# Altium PCB KRing_B3.PcbDoc
Units mm, origin at the board's own origin, x right, y up, seen from the top; angles counter-clockwise.
Board outline 37.8 x 37.8 mm, 2 copper layers (Top Layer, Bottom Layer); 76 components, 48 nets, 272 pads, 208 vias.
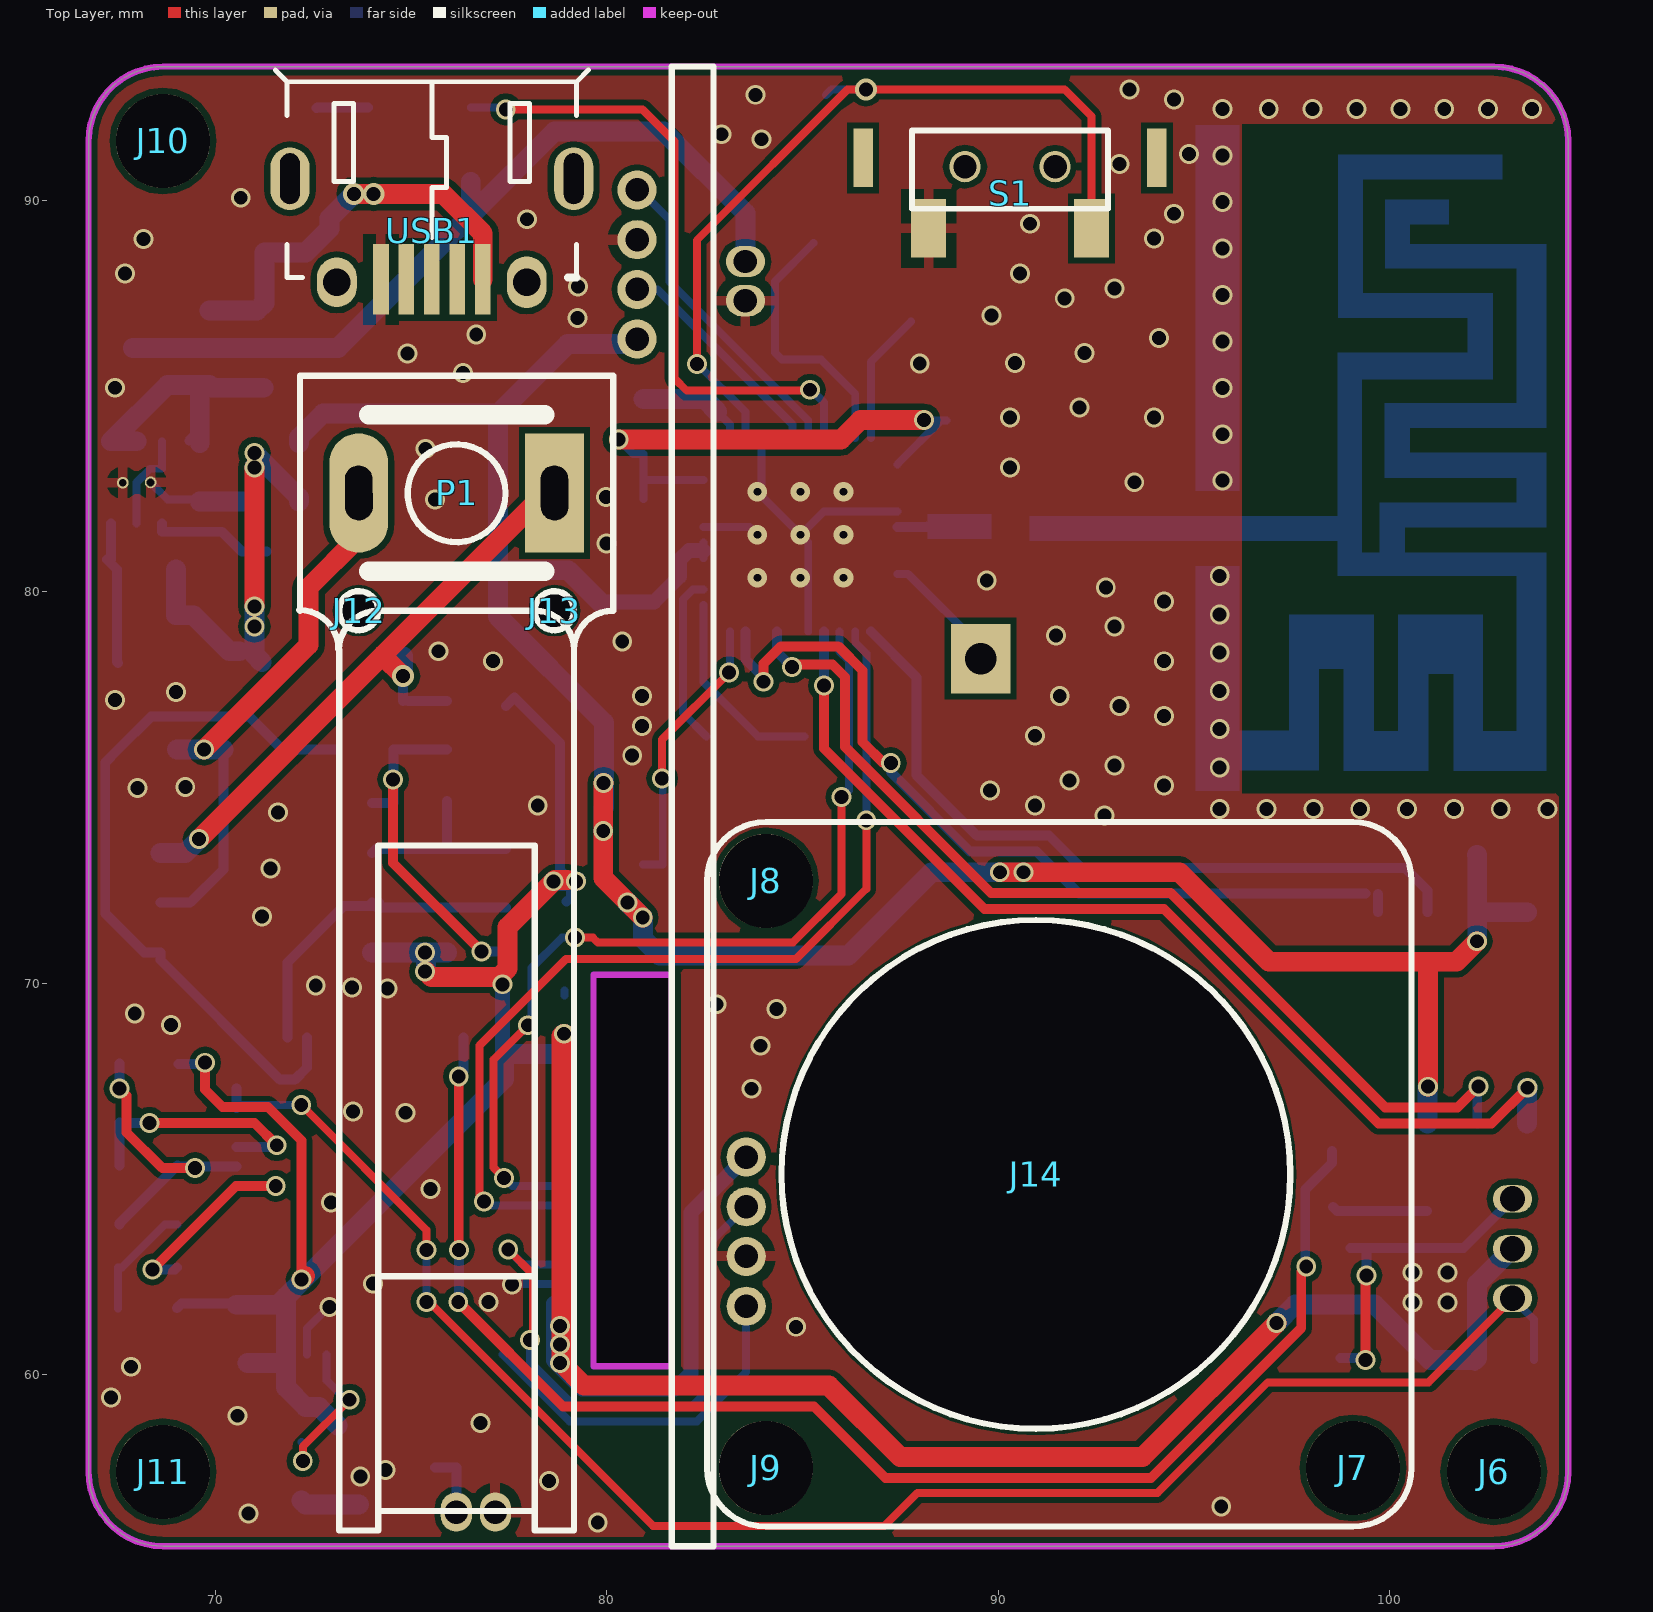
[diagram p0: Top Layer view]
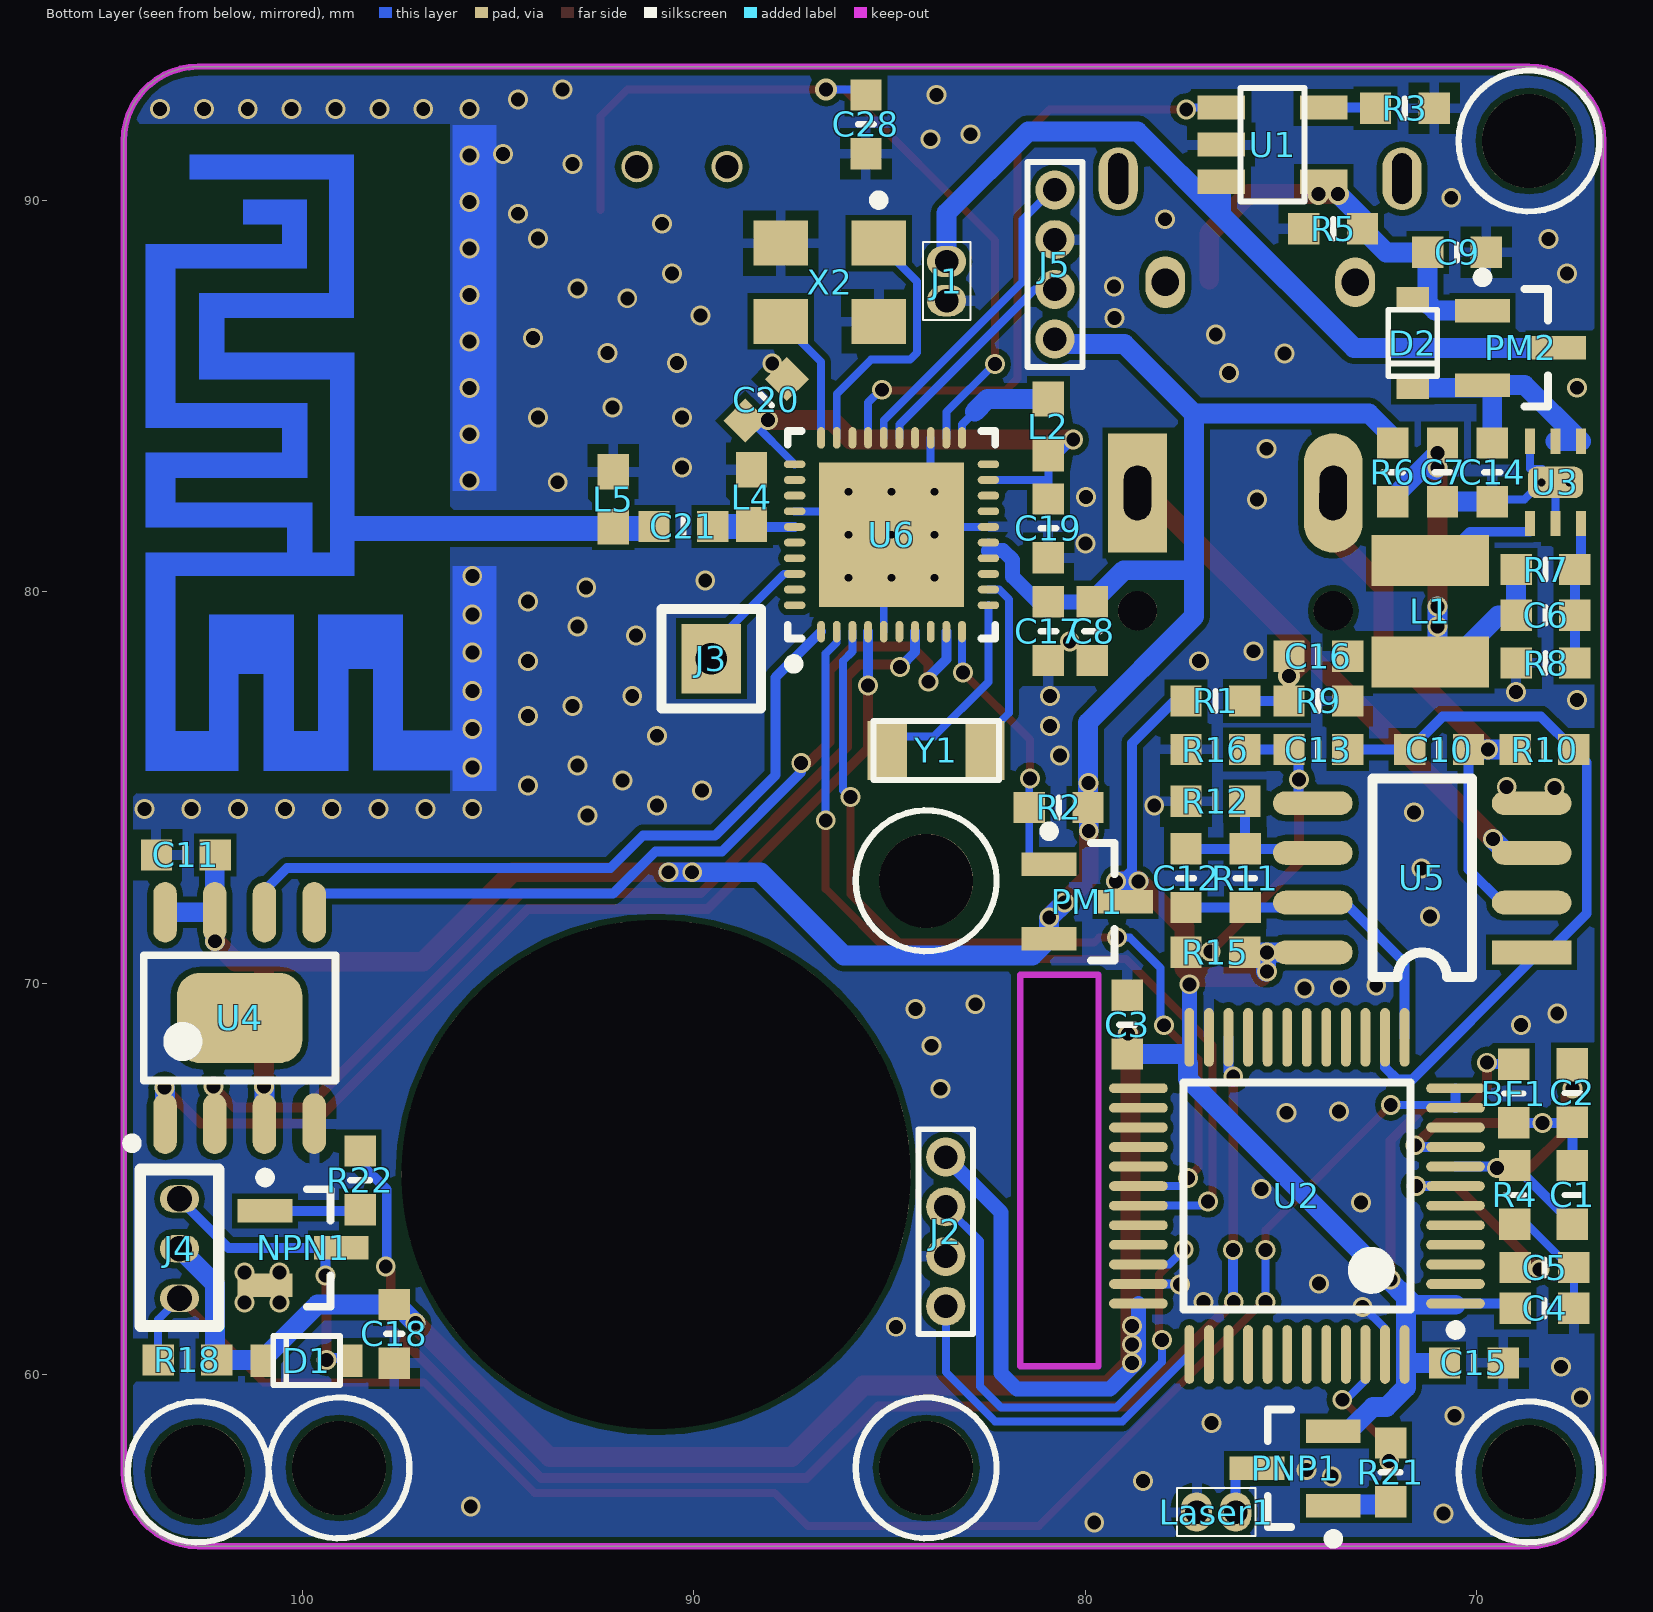
[diagram p1: Bottom Layer view, seen from below]

## Layer stack, top to bottom
Top Layer: signal copper 0.0356
Dielectric: dielectric 0.32, FR-4, Dk 4.8
Bottom Layer: signal copper 0.0356

## Board outline
66.758,57.522 66.758,91.522 cw(c68.658,91.522) 68.658,93.422 102.658,93.422 cw(c102.658,91.522) 104.558,91.522 104.558,57.522 cw(c102.658,57.522) 102.658,55.622 68.658,55.622 cw(c68.658,57.522)
cut-out: 79.666,70.21 81.673,70.21 81.673,60.228 79.666,60.228

## Design rules (kind name [scope] priority, off if disabled: settings)
Clearance "6mil Special" [(HasFootprint('FPC 0.5mm 4P') OR HasFootprint('FPC 0.5mm 16P') OR HasFootprint('QFN40P500X500X90_HS-41L'))] p1: gap=0.152
Clearance "8mil all" [All] p2: gap=0.152
ComponentClearance [All] p1: gap=-100 collisioncheckmode=3 verticalgap=0.254 showdistances=FALSE
Height [All] p1: minheight=0 maxheight=50.8 prefheight=12.7
HoleSize [All] p1: absolutevalues=TRUE maxlimit=1817.048 minlimit=0 maxpercent=80.000 minpercent=20.000
HoleToHoleClearance [All] p1: gap=0.203 allowstackedmicrovias=TRUE
MinimumSolderMaskSliver [All] p1: minsoldermaskwidth=0
PolygonConnect PolygonConnect_1 [isvia] p1: connectstyle=Direct reliefconductorwidth=0.254 reliefentries=4 polygonreliefangle="90 Angle" airgapwidth=0.254
PolygonConnect [All] p2: connectstyle=Relief reliefconductorwidth=0.254 reliefentries=4 polygonreliefangle="90 Angle" airgapwidth=0.254
RoutingCorners [All] p1: cornerstyle=45-Degree minsetback=0.254 maxsetback=2.54
RoutingVias [All] p1: holewidth=0.356 width=0.508 viastyle="Through Hole" minholewidth=0.356 minwidth=0.508 maxholewidth=2.54 maxwidth=5.08
SilkToSilkClearance [All] p1: silktosilkclearance=0
SilkToSolderMaskClearance [IsPad] p1: minsilkscreentomaskgap=0 clearancetoexposedcopper=TRUE
SolderMaskExpansion [All] p1: expansion=0.102
Width 20mil_Power [(InNet('EP_SUPPLY&VBAT') OR InNet('PSUPPLY') OR InNet('P_3.3V') OR InNet('PSUPPLYBAT') OR InNet('P_3.3V') OR InNet('P_5V'))] p1: maxlimit=1000 minlimit=0.203 preferedwidth=0.508
Width 8mil_Basic [All] p2: maxlimit=100 minlimit=0.203 preferedwidth=0.254
20 further rules are at their usual default settings.

## Components (designator, comment, footprint, x,y, rotation, side; value= is the part's Value field where it differs from the comment)
BF1 "BF" R0603 69.049,67.188 r90 bottom
C1 "1uf" C0603 67.55,64.597 r90 bottom
C2 "0.1uf" C0603 67.55,67.201 r270 bottom
C3 "1uf" C0603 78.921,68.947 r270 bottom
C4 "1uf" C0603 68.262,61.701 r0 bottom
C5 "1uf" C0603 68.262,62.743 r0 bottom
C6 "22pf" C0603 68.236,79.405 r180 bottom
C7 "10uf" C0603 70.866,83.058 r90 bottom
C8 "1uf" C0603 79.819,78.999 r90 bottom
C9 "1uf" C0603 70.497,88.676 r0 bottom
C10 "6.8pF" C0603 70.954,75.976 r180 bottom
C11 "10uf" C0603 102.973,73.283 r180 bottom
C12 "240pF" C0603 77.419,72.688 r90 bottom
C13 "0.15uf" C0603 74.041,75.976 r180 bottom
C14 "10uf" C0603 69.596,83.058 r270 bottom
C15 "1uf" C0603 70.065,60.304 r180 bottom
C16 "1uf" C0603 74.041,78.359 r180 bottom
C17 "10uf" C0603 80.936,78.999 r90 bottom
C18 "10uf" C0603 97.647,61.049 r90 bottom
C19 "1uf" C0603 80.936,81.627 r270 bottom
C20 "1uf" C0603 88.145,84.909 r135 bottom
C21 "1uf" C0603 90.261,81.674 r0 bottom
C28 "10uf" C0603 85.598,91.948 r90 bottom
D1 "1N5817" SOD323(0805) 99.888,60.364 r0 bottom
D2 "1N5817" SOD323(0805) 71.628,86.36 r270 bottom
J1 "CON2" BATTRY_CONNECTOR 83.536,88.443 r270 bottom
J2 "CON4" "CON4 1mm" 83.558,63.66 r90 bottom
J3 "CON1" CON1 89.548,78.295 r180 bottom
J4 "CON3" "Motor Connector" 103.134,63.226 r270 bottom
J5 "CON4" "CON4 1mm" 80.77,88.366 r270 bottom
J6 "CON1" 2.4mm#1 102.755,57.51 r0 top
J7 "CON1" 2.4mm#2 99.097,57.688 r0 top
J8 "CON1" 2.4mm#3 84.06,72.623 r0 top
J9 "CON1" 2.4mm#4 83.933,57.663 r0 top
J10 "CON1" 2.4mm#5 68.744,91.546 r0 top
J11 "CON1" 2.4mm#6 68.658,57.51 r0 top
J12 "CON1" 0.5mm 73.658,79.522 r0 top
J13 "CON1" 0.5mm 78.658,79.522 r0 top
J14 "CON1" 6.5mm 91.02,65.181 r0 top
L1 "4.7uh" GDNR3012 71.183,79.507 r180 bottom
L2 "2.2uh" L0603 80.936,84.227 r270 bottom
L4 "NC" L0603 88.519,82.423 r270 bottom
L5 "NC" L0603 92.054,82.369 r270 bottom
Laser1 "Laser" BATTRY_CONNECTOR 76.152,56.494 r0 bottom
NPN1 "8050" SOT23-3 99.974,63.242 r180 bottom
P1 "photodetector" BPW34 76.161,82.529 r180 top
PM1 "Si2303" SOT23-3 79.945,72.089 r180 bottom
PM2 "Si2303" SOT23-3 68.871,86.238 r180 bottom
PNP1 "8550" SOT23-3 74.632,57.611 r0 bottom
R1 "4K7" R0603 76.669,77.216 r0 bottom
R2 "100K" R0603 80.675,74.495 r180 bottom
R3 "20K" R0603 71.831,92.359 r0 bottom
R4 "0" R0603 69.024,64.597 r90 bottom
R5 "1M" R0603 73.66,89.281 r0 bottom
R6 "50R" R0603 72.136,83.058 r270 bottom
R7 "120K" R0603 68.236,80.574 r0 bottom
R8 "27K" R0603 68.236,78.186 r0 bottom
R9 "1K" R0603 74.041,77.216 r0 bottom
R10 "10M" R0603 68.262,75.976 r180 bottom
R11 "220K" R0603 75.907,72.688 r270 bottom
R12 "3K" R0603 76.669,74.655 r180 bottom
R15 "2M" R0603 76.669,70.795 r180 bottom
R16 "510" R0603 76.669,75.976 r180 bottom
R18 "10K" R0603 102.93,60.382 r180 bottom
R21 "1K" R0603 72.194,57.51 r90 bottom
R22 "1K" R0603 98.519,64.97 r90 bottom
S1 "SW_Mini" SW_Mini 90.297,90.59 r180 top
U1 "LTC4054" LTC4054 75.21,91.43 r270 bottom
U2 "STM32F103C8T6" TSQFP50P900X900X160-48L 74.586,64.572 r0 bottom
U3 "TPS62260" QFN2x2-6 68.632,81.75 r90 bottom
U4 "W25X20CLSNIG" SOIC8 101.598,69.118 r90 bottom
U5 "LMC6482" LMC6482 68.592,70.795 r0 bottom
U6 "DA14580-01AT1" QFN40P500X500X90_HS-41L 84.943,81.462 r90 bottom
USB1 "MicroUSB" MICROUSB 75.526,89.235 r270 top locked
X2 "3225 16Mhz" 3225 86.522,87.911 r270 bottom
Y1 "FC-135" FC-135 83.804,75.951 r0 bottom

## Footprints (in the part's own frame and the unit in brackets; to place one, negate y for a bottom-side part, rotate by r counter-clockwise, add the part's x,y. Pads: shape width x height; smd on the part's side, far side on the other; paste and mask are expansions set on the pad)
0.5mm [mm]
  round 1 hole 1: 1(0,0)
2.4mm#1 [mm]
  round 2.4 hole 2.4: 1(-0.097,0.012)
2.4mm#2 [mm]
  round 2.4 hole 2.4: 1(-0.039,-0.066)
2.4mm#3 [mm]
  round 2.4 hole 2.4: 1(-0.002,-0.001)
2.4mm#4 [mm]
  round 2.4 hole 2.4: 1(0.125,-0.041)
2.4mm#5 [mm]
  round 2.4 hole 2.4: 1(-0.086,-0.024)
2.4mm#6 [mm]
  round 2.4 hole 2.4: 1(0,0.012)
6.5mm [mm]
  round 13 hole 13 unplated: ""(-0.062,-0.059)
3225 [mm]
  rect 1.15x1.4 smd: 1(-1,1.25) 2(-1,-1.25) 3(1,-1.25) 4(1,1.25)
  silkscreen extent -2.22,1.13 -1.98,1.37, body extent -1.25,-1.6 1.25,1.6, height 0.7
BATTRY_CONNECTOR [mm]
  oval 0.8x1 hole 0.6: 1(0,0) 2(1,0)
  silkscreen extent -0.5,-0.61 1.5,0.61
BPW34 [mm]
  rect 1.5x3.048 hole 0.7 slot 1.4 at 90.5 deg: A(-2.5,0)
  oval 1.5x3.048 hole 0.7 slot 1.4 at 90.5 deg: C(2.5,0)
  silkscreen extent -2.25,-2 2.25,2
C0603 [mm]
  rect 0.8x0.8 smd: 1(-0.75,0) 2(0.75,0)
  silkscreen extent 0,-0.2 0,0.2, body extent -0.8,-0.4 0.8,0.4, height 0.8
CON1 [mil]
  rect 60x70 hole 32: 1(0,0)
  silkscreen extent -50,-50 50,50, body extent -51,-50 52,50, height 295
"CON4 1mm" [mm]
  round 1 hole 0.6: 1(-1.905,0) 2(-0.635,0) 3(0.635,0) 4(1.905,0)
  silkscreen extent -2.62,-0.7 2.61,0.7
FC-135 [mm]
  rect 1x1.5 smd: 1(-1.25,0) 2(1.25,0)
  silkscreen extent -1.6,-0.75 1.6,0.75, body extent -1.6,-0.75 1.6,0.75, height 0.8
GDNR3012 [mm]
  rect 3x1.3 smd: 1(0,1.3) 2(0,-1.3)
  body extent -1.5,-1.5 1.5,1.5, height 1.2
L0603 [mm]
  rect 0.9x0.8 smd: 1(-0.7,0) 2(0.7,0)
  body extent -0.8,-0.4 0.8,0.4, height 0.8
LMC6482 [mil]
  rect 80x24 smd: 1(0,0)
  oval 80x24 smd: 2(0,-50) 3(0,-100) 4(0,-150) 5(220,-150) 6(220,-100) 7(220,-50) 8(220,0)
  silkscreen extent 60,-175 160,25, body extent 24,-176 196,27, height 43
LTC4054 [mm]
  rect 0.62x1.22 smd: 1(-0.95,-1.31) 2(0,-1.31) 3(0.95,-1.31) 4(0.95,1.31) 5(-0.95,1.31)
  silkscreen extent -1.45,-0.81 1.45,0.81, body extent -1.45,-0.82 1.45,0.81, height 1
MICROUSB [mm]
  oval 1.6x1 hole 0.5 slot 1.3 at 0 deg unplated: 0(-1.325,3.625) 0(-1.325,-3.625)
  rect 1.8x0.4 smd: 1(1.25,1.3) 2(1.25,0.65) 3(1.25,0) 4(1.25,-0.65) 5(1.25,-1.3)
  oval 1.321x1.016 hole 0.7 unplated: ""(1.325,2.425)
  oval 1.27x1.016 hole 0.7 unplated: ""(1.325,-2.425)
  silkscreen extent -4.1,-4 1.2,4, body extent -3.62,-3.96 1.81,4.02, height 2.99
"Motor Connector" [mm]
  oval 0.7x1 hole 0.65: 1(-1.27,0) 2(0,0) 3(1.27,0)
  silkscreen extent -2.02,-1 1.98,1
QFN2x2-6 [mm]
  rect 0.65x0.25 smd: 1(0,0) 2(0,-0.65) 3(0,-1.3) 4(2.1,-1.3) 5(2.1,-0.65) 6(2.1,0)
  round 0.3 hole 0.2: 7(1.04,-1) 7(1.05,-0.29)
  rrect50% 0.8x1.4 smd: 7(1.05,-0.65)
  body extent 0.22,-1.59 1.86,0.29, height 0.8
QFN40P500X500X90_HS-41L [mm] "QFN, 40-Leads, Body 5.00x5.00mm, Pitch 0.40mm, Thermal Pad 3.70x3.70mm, IPC High Density"
  oval 0.55x0.2 smd: 1(-2.475,1.8) 2(-2.475,1.4) 3(-2.475,1) 4(-2.475,0.6) 5(-2.475,0.2) 6(-2.475,-0.2) 7(-2.475,-0.6) 8(-2.475,-1) 9(-2.475,-1.4) 10(-2.475,-1.8) 21(2.475,-1.8) 22(2.475,-1.4) 23(2.475,-1) 24(2.475,-0.6) 25(2.475,-0.2) 26(2.475,0.2) 27(2.475,0.6) 28(2.475,1) 29(2.475,1.4) 30(2.475,1.8)
  oval 0.2x0.55 smd: 11(-1.8,-2.475) 12(-1.4,-2.475) 13(-1,-2.475) 14(-0.6,-2.475) 15(-0.2,-2.475) 16(0.2,-2.475) 17(0.6,-2.475) 18(1,-2.475) 19(1.4,-2.475) 20(1.8,-2.475) 31(1.8,2.475) 32(1.4,2.475) 33(1,2.475) 34(0.6,2.475) 35(0.2,2.475) 36(-0.2,2.475) 37(-0.6,2.475) 38(-1,2.475) 39(-1.4,2.475) 40(-1.8,2.475)
  rect 3.7x3.7 smd: 41(0,0)
  silkscreen extent -3.42,-2.65 2.65,2.65, body extent -2.5,-2.5 2.5,2.5, height 0.9
R0603 [mm]
  rect 0.8x0.8 smd: 1(-0.75,0) 2(0.75,0)
  silkscreen extent 0,-0.25 0,0.25, body extent -0.8,-0.4 0.8,0.4, height 0.5
SOD323(0805) [mm]
  rect 0.63x0.83 smd: A(-1.115,0) C(1.115,0)
  silkscreen extent -0.85,-0.63 0.85,0.63, body extent -0.85,-0.63 0.86,0.63, height 1.1
SOIC8 [mm]
  oval 1.55x0.6 smd: 1(-2.7,1.905) 2(-2.7,0.635) 3(-2.7,-0.635) 4(-2.7,-1.905) 5(2.7,-1.905) 6(2.7,-0.635) 7(2.7,0.635) 8(2.7,1.905)
  rrect50% 2.3x3.2 smd: 9(0,0)
  silkscreen extent -3.32,-2.45 1.6,2.88, body extent -1.65,-2.41 1.65,2.41, height 1.35
SOT23-3 [mm]
  rect 1.4x0.6 smd: 1(-0.975,0.95) 2(-0.975,-0.95) 3(0.975,0)
  silkscreen extent -1.1,-1.5 0.7,1.92, body extent -0.7,-1.5 0.7,1.5, height 1
SW_Mini [mm]
  rect 0.9x1.5 smd: 1(2.08,1.3) 2(-2.08,1.3)
  rect 0.5x1.5 smd: ""(-3.75,-0.5) ""(3.75,-0.5)
  round 0.8 hole 0.6: ""(-1.15,-0.277) ""(1.15,-0.277)
  silkscreen extent -2.5,-1.2 2.5,0.8, body extent -3.76,-2.28 3.74,1.72, height 3.4
TSQFP50P900X900X160-48L [mm] "TSQFP, 48-Leads, Body 7.00x7.00mm, Pitch 0.50mm, IPC High Density"
  oval 1.5x0.25 smd: 1(-4.05,2.75) 2(-4.05,2.25) 3(-4.05,1.75) 4(-4.05,1.25) 5(-4.05,0.75) 6(-4.05,0.25) 7(-4.05,-0.25) 8(-4.05,-0.75) 9(-4.05,-1.25) 10(-4.05,-1.75) 11(-4.05,-2.25) 12(-4.05,-2.75) 25(4.05,-2.75) 26(4.05,-2.25) 27(4.05,-1.75) 28(4.05,-1.25) 29(4.05,-0.75) 30(4.05,-0.25) 31(4.05,0.25) 32(4.05,0.75) 33(4.05,1.25) 34(4.05,1.75) 35(4.05,2.25) 36(4.05,2.75)
  oval 0.25x1.5 smd: 13(-2.75,-4.05) 14(-2.25,-4.05) 15(-1.75,-4.05) 16(-1.25,-4.05) 17(-0.75,-4.05) 18(-0.25,-4.05) 19(0.25,-4.05) 20(0.75,-4.05) 21(1.25,-4.05) 22(1.75,-4.05) 23(2.25,-4.05) 24(2.75,-4.05) 37(2.75,4.05) 38(2.25,4.05) 39(1.75,4.05) 40(1.25,4.05) 41(0.75,4.05) 42(0.25,4.05) 43(-0.25,4.05) 44(-0.75,4.05) 45(-1.25,4.05) 46(-1.75,4.05) 47(-2.25,4.05) 48(-2.75,4.05)
  silkscreen extent -4.17,-2.9 2.9,3.55, body extent -3.5,-3.5 3.5,3.5, height 1.6

## Part data
BF1: "磁珠"
C1 C2 C3 C4 C5 C6 C7 C8 C9 C10 C11 C12 C13 C14 C15 C16 C17 C18 C19 C20 C21 C28: library part C
D1 D2: library part Diode
L1 L2 L4 L5: library part L
NPN1: library part NPN
PM1 PM2: library part PMOS
PNP1: library part PNP
R1 R2 R3 R4 R5 R6 R7 R8 R9 R10 R11 R12 R15 R16 R18 R21 R22: library part R

## Via types
v1: diameter 0.508, hole 0.356, Top Layer to Bottom Layer, 195 vias
v2: diameter 0.5, hole 0.2, Top Layer to Bottom Layer, 9 vias
v3: diameter 0.559, hole 0.356, Top Layer to Bottom Layer, 4 vias

## Nets (pads, with @x,y where several pads share a name; then routed paths per layer and width w, separated by ;. In a path a pad name is that pad's centre, name@x,y a point inside that pad or via, vN(x,y) a via of type N, cw(c..) or ccw(c..) an arc to the next point about the centre after c; other vN are vias at no path point)
AGND: C1.1 C2.1 R4.2 U2.8 | length 7.6
  Top Layer w0.254: v1(67.55,67.315) 67.728,67.137 67.728,66.196 68.641,65.283 v1(69.481,65.283)
  Bottom Layer w0.254: C1.1 67.55,63.874 R4.2 69.049,65.322 v1@69.481,65.322 ; v1(67.55,67.315) C2.1 ; v1(69.481,65.283) v1@69.481,65.322 ; U2.8 v1@69.481,65.322
C_LASER: R21.2 U2.46 | length 4
  Top Layer w0.203: v1(72.23,57.799) 72.23,58.167 v1(73.428,59.365)
  Bottom Layer w0.203: R21.2@72.199,58.286 72.23,58.254 v1(72.23,57.799) ; U2.46 72.836,59.861 73.332,59.365 v1(73.428,59.365)
C_MOTOR: R22.2 U2.22 | length 36.7
  Top Layer w0.254: v1(76.201,61.866) 78.877,59.191 85.291,59.191 87.116,57.366 93.902,57.366 97.737,61.201 97.737,62.638 v1(97.864,62.765) ; v1(76.214,67.622) 76.214,63.2 v1(76.22,63.194)
  Bottom Layer w0.254: v1(76.201,61.866) 76.22,61.885 v1(76.22,63.194) ; v1(76.214,67.622) 76.336,67.744 U2.22 ; v1(97.864,62.765) 97.84,62.79 97.84,64.736 98.519,65.415 R22.2
CHARGE_STATES: U1.1 U6.27 | length 16.6
  Top Layer w0.203: v1(77.415,92.328) 80.907,92.328 81.727,91.508 81.727,85.455 82.04,85.142 85.162,85.142 v1(85.186,85.166)
  Bottom Layer w0.203: U1.1 77.363,92.38 v1(77.415,92.328) ; v1(85.186,85.166) 85.216,85.166 85.543,84.839 U6.27
DA_RXD: U2.30 U6.3 | length 23.1
  Top Layer w0.203: v1(77.374,65.028) 77.102,65.3 77.102,68.051 v1(77.982,68.932) ; v1(79.179,71.169) 79.64,71.169 79.766,71.043 84.749,71.043 85.989,72.283 v1(85.989,74.758)
  Bottom Layer w0.203: v1(77.374,65.028) 77.58,64.822 U2.30 ; v1(77.982,68.932) 78.073,69.022 78.073,70.393 78.849,71.169 v1(79.179,71.169) ; 85.943,78.644 85.943,78.478 ; U6.3 85.943,78.478 ; v1(85.989,74.758) 86.012,74.758 86.18,74.926 86.18,78.241 85.943,78.478
DA_TXD: U2.31 U6.2 | length 24.1
  Top Layer w0.203: v1(76.856,64.425) 76.746,64.535 76.746,68.414 78.956,70.624 84.833,70.624 86.625,72.416 v1(86.625,74.168)
  Bottom Layer w0.203: v1(76.856,64.425) 76.959,64.322 U2.31 ; U6.2 86.343,78.711 86.625,78.429 v1(86.625,74.168)
EVCC: C9.2 D2.A PM2.1 R5.1 U1.4 USB1.1 | length 10.7
  Top Layer w0.508: v3(73.533,90.17) v3(74.041,90.17) 75.819,90.17 76.826,89.163 USB1.1
  Bottom Layer w0.508: PM2.1 71.059,87.188 71.247,87.376 C9.2 72.305,88.676 R5.1 72.91,89.547 v3(73.533,90.17)
F_CLK: U4.6 U6.1 | length 19
  Bottom Layer w0.254: U6.1 87.91,77.82 87.91,75.319 89.448,73.781 91.295,73.781 92.127,72.949 100.39,72.949 100.963,72.376 U4.6
F_CS: U4.1 U6.4 | length 26.2
  Top Layer w0.254: v1(85.544,77.611) 85.544,76.004 89.647,71.901 94.235,71.901 99.714,66.422 102.6,66.422 v1(103.514,67.336)
  Bottom Layer w0.254: U6.4 85.544,78.986 v1(85.544,77.611)
  Bottom Layer w0.508: U4.1 103.503,67.325 v1(103.514,67.336)
F_MISO: U4.2 U6.7 | length 25.5
  Top Layer w0.254: v1(84.731,78.079) 84.797,78.145 85.765,78.145 86.078,77.832 86.078,76.045 89.815,72.308 94.403,72.308 99.882,66.829 101.728,66.829 v1(102.262,67.363)
  Bottom Layer w0.254: U6.7 84.343,78.467 v1(84.731,78.079) ; U4.2 102.233,67.334 v1(102.262,67.363)
F_MOSI: U4.5 U6.9 | length 21.8
  Top Layer w0.254: v1(84.002,77.707) 84.002,78.169 84.445,78.612 85.909,78.612 86.53,77.991 86.53,76.168 87.071,75.627 v1(87.251,75.627)
  Bottom Layer w0.254: U6.9 83.543,78.28 84.002,77.821 v1(84.002,77.707) ; v1(87.251,75.627) 87.251,75.399 89.276,73.375 90.974,73.375 92.053,72.296 99.38,72.296 ; U4.5 U4.5@99.693,72.281
GND: C3.1 C4.1 C5.1 C7.1 C8.1 C9.1 C11.1 C14.2 C15.2 C16.2 C17.1 C18.1 C19.2 C20.2 C28.1 J1.2 J2.2 J5.2 L4.1 L5.1 Laser1.2 NPN1.2 R3.1 R4.1 R5.2 R8.2 R9.1 R12.1 R16.1 S1.1 U1.2 U2.23 U2.35 U2.47 U3.2 U3.6 U3.7 U4.4 U5.4 U6.5 U6.16 U6.23 U6.34 U6.41 USB1.5 X2.2 X2.4 | length 20.5
  Bottom Layer w0.203: C4.1 C5.1 67.606,62.743 68.71,63.847 R4.1 ; U3.2 67.982,82.8 68.331,83.149 68.629,83.149 68.632,83.152 U3.6 ; U3.7@68.342,82.8 68.779,82.364 C14.2@69.582,82.364 ; U2.47 72.336,61.183 72.884,61.73 v1(72.916,61.73) ; v1(77.575,62.313) 77.584,62.322 U2.35 ; C3.1 C3.1@78.921,69.824 ; U6.16 83.643,81.662 v2(83.843,81.462) ; U6.23 83.943,82.462 v2(84.943,81.462) ; U6.5 85.143,81.262 v2(84.943,81.462) ; U6.34 85.543,82.062 v2(84.943,81.462)
  Bottom Layer w0.508: C14.2 C7.1
  other v1: 79.765,56.225 70.839,56.46 95.694,56.634 78.515,57.291 73.699,57.407 74.344,57.573 76.768,58.769 70.56,58.955 67.333,59.425 67.842,60.207 84.832,61.228 76.977,61.861 100.584,61.849 101.473,61.849 74.024,62.329 100.584,62.611 101.473,62.611 72.954,64.408 75.494,64.746 74.849,66.696 73.508,66.733 83.693,67.31 83.919,68.409 68.862,68.942 67.936,69.233 84.328,69.342 82.804,69.469 74.391,69.866 73.49,69.899 72.561,69.949 71.192,71.709 71.4,72.936 92.71,74.295 71.598,74.372 95.654,74.454 96.85,74.454 98.047,74.454 99.243,74.454 100.44,74.454 101.636,74.454 102.833,74.454 104.029,74.454 78.232,74.549 90.932,74.549 89.789,74.93 68.007,74.995 69.228,75.014 94.234,75.057 91.821,75.184 95.654,75.521 92.964,75.565 80.645,75.819 90.932,76.327 95.654,76.498 80.899,76.581 94.234,76.835 93.091,77.089 67.433,77.236 80.899,77.343 91.567,77.343 68.988,77.448 95.654,77.475 77.089,78.232 94.234,78.232 95.654,78.452 75.692,78.486 80.391,78.74 91.469,78.893 92.964,79.121 95.654,79.429 94.234,79.756 92.744,80.119 89.703,80.291 95.654,80.406 79.984,81.237 75.61,82.365 79.978,82.43 93.472,82.804 95.727,82.843 90.297,83.185 75.366,83.659 95.727,84.029 90.297,84.455 93.98,84.455 92.075,84.709 67.437,85.217 95.727,85.216 76.327,85.598 87.991,85.837 90.424,85.852 74.909,86.096 92.202,86.106 95.727,86.402 94.107,86.487 76.661,86.583 79.248,86.995 89.826,87.06 91.694,87.503 95.727,87.589 92.964,87.757 79.265,87.802 67.691,88.138 90.551,88.138 95.727,88.775 68.163,89.02 93.98,89.027 90.805,89.408 77.955,89.522 94.488,89.662 95.727,89.962 70.645,90.071 93.091,90.932 95.727,91.148 94.869,91.186 83.947,91.567 82.931,91.694 95.727,92.335 96.906,92.335 98.027,92.335 99.148,92.335 100.269,92.335 101.39,92.335 102.511,92.335 103.632,92.335 94.488,92.583 83.792,92.702 93.345,92.837
  other v2: 83.843,80.362 84.943,80.362 86.043,80.362 86.043,81.462 83.843,82.562 84.943,82.562 86.043,82.562
LASER_STATE: PM1.1 R2.1 U6.10 | length 7.2
  Top Layer w0.203: v1(81.409,75.24) 81.409,76.232 v1(83.122,77.945)
  Bottom Layer w0.203: PM1.1 81.425,73.039 R2.1 81.425,75.224 v1(81.409,75.24) ; v1(83.122,77.945) 83.143,77.966 U6.10
M_SIG: J4.3 R18.1 U2.11 U2.12 | length 42.9
  Top Layer w0.203: v1(72.191,66.898) 75.386,63.703 v1(75.386,63.188) ; v1(75.386,61.866) 75.454,61.866 81.181,56.139 87.083,56.139 87.929,56.985 94.06,56.985 96.884,59.809 100.986,59.809 J4.3
  Bottom Layer w0.203: U2.11 70.613,66.898 v1(72.191,66.898) ; v1(75.386,61.866) v1(75.386,63.188) ; J4.3 103.68,61.41 R18.1
  Bottom Layer w0.254: U2.11 U2.12
NetC5_2: C5.2 U2.7 | length 5.7
  Top Layer w0.254: v1(68.389,62.692) 70.522,64.826 v1(71.538,64.826)
  Bottom Layer w0.254: v1(68.389,62.692) 68.961,62.692 C5.2 ; U2.7 70.54,64.826 v1(71.538,64.826)
NetC6_1: C6.1 C7.2 L1.2 R6.2 R7.2 | length 10.3
  Top Layer w0.508: v1(70.993,79.629) v1(70.993,83.185)
  Bottom Layer w0.508: R7.2 C6.1 69.439,79.405 70.358,78.486 L1.2@70.612,78.486 ; v1(70.993,79.629) v1(70.993,79.121) 70.993,78.396 L1.2 ; v1(70.993,83.185) 71.064,83.114 71.064,83.485 72.136,82.413 R6.2
  other v1: 70.993,83.554
NetC6_2: C6.2 R7.1 R8.1 U3.3 | length 3.7
  Bottom Layer w0.254: R7.1@67.231,80.829 R7.1 C6.2 67.486,78.211 R8.1@67.512,78.186 ; R7.1@67.332,80.829 U3.3
NetC10_2: C10.2 P1.C R10.1 U5.2 | length 14.4
  Top Layer w0.508: v1(69.709,75.976) 72.376,78.643 72.376,80.116 73.661,81.401 P1.C
  Bottom Layer w0.254: U5.2 69.354,72.065 70.204,72.915 C10.2
  Bottom Layer w0.508: R10.1 v1(69.709,75.976) C10.2
NetC12_2: C12.2 R11.1 R12.2 U5.6 | length 4.7
  Bottom Layer w0.254: U5.6@74.002,73.335 74.105,73.438 R11.1 ; R12.2 75.919,73.45 R11.1 ; C12.2 R11.1
NetC13_1: C13.1 R15.1 R16.2 U5.5 | length 9.3
  Top Layer w0.254: v1(74.535,75.214) 74.535,73.081 v1(76.796,70.82)
  Bottom Layer w0.254: U5.5@74.002,74.605 74.549,74.605 74.549,75.976 R16.2 ; v1(76.796,70.82) 77.394,70.82 R15.1
NetC14_1: C14.1 D2.C PM2.2 U3.4 U3.5 | length 7.1
  Bottom Layer w0.254: C14.1@69.328,83.864 C14.1@69.532,84.067
  Bottom Layer w0.508: U3.5 U3.4 68.77,85.288 PM2.2 ; C14.1 69.596,85.217 D2.C@71.223,85.217
NetC19_1: C19.1 C20.1 L2.2 U6.19 U6.31 | length 13.6
  Top Layer w0.508: v1(80.302,83.895) 85.976,83.895 86.478,84.397 v1(88.103,84.397)
  Bottom Layer w0.203: v1(80.302,83.895) 80.67,83.527 L2.2 80.936,82.862 ; C19.1 80.936,82.862 ; U6.19 80.936,82.862 ; U6.31 C20.1@88.535,84.379 ; v1(88.103,84.397) 88.121,84.379 C20.1@88.535,84.379 ; C20.1 C20.1@88.535,84.379
NetC21_1: C21.1 L4.2 U6.35 | length 0.8
  Bottom Layer w0.254: U6.35 88.184,81.662 L4.2@88.19,81.668 ; L4.2@88.41,81.656 L4.2@88.437,81.629
NetC21_2: C21.2 L5.2
NetD1_A: D1.A J4.1 NPN1.3 | length 8.6
  Top Layer w0.254: v1(99.374,60.382) 99.374,62.515 v1(99.4,62.541)
  Bottom Layer w0.254: D1.A@98.742,60.432 99.324,60.432 v1(99.374,60.382) ; v1(99.4,62.541) 99.4,63.242 NPN1.3 101.879,63.242 J4.1
NetJ3_1: J3.1 U6.38 | length 3.2
  Bottom Layer w0.203: U6.38 87.694,80.462 89.548,78.608 J3.1
NetL1_1: L1.1 U3.1 | length 3.1
  Bottom Layer w0.254: U3.1 68.632,81.539 70.167,81.539 70.67,81.035 L1.1@71.31,81.035
NetL2_1: L2.1 U6.21 | length 2.8
  Bottom Layer w0.203: 82.819,84.605 83.143,84.281 U6.21
  Bottom Layer w0.508: L2.1 82.497,84.927 82.819,84.605
NetLaser1_1: Laser1.1 PNP1.3 | length 1.7
  Bottom Layer w0.254: PNP1.3@75.612,57.637 76.152,57.637 Laser1.1
NetNPN1_1: NPN1.1 R22.1 | length 2.4
  Bottom Layer w0.254: R22.1@98.55,64.293 98.651,64.192 NPN1.1
NetPNP1_1: PNP1.1 R21.1 | length 1.5
  Bottom Layer w0.508: R21.1@72.199,56.786 72.297,56.687 PNP1.1@73.662,56.687
NetR3_2: R3.2 U1.5 | length 1.3
  Bottom Layer w0.254: R3.2 72.601,92.38 U1.5
NetU6_11: U6.11 Y1.2 | length 5.1
  Bottom Layer w0.203: U6.11 82.468,77.704 83.863,76.309 Y1.2@85.043,76.309
NetU6_12: U6.12 Y1.1 | length 4.4
  Bottom Layer w0.203: U6.12 82.192,80.062 81.939,79.809 81.939,76.913 Y1.1@82.543,76.309
NetU6_29: U6.29 X2.1 | length 6.8
  Bottom Layer w0.203: X2.1 84.29,87.929 84.29,86.114 84.469,85.935 85.465,85.935 86.343,85.057 U6.29
NetU6_30: U6.30 X2.3 | length 3.4
  Bottom Layer w0.203: U6.30 86.743,85.882 X2.3
NSWCLK: J2.1 U2.37 | length 9.1
  Bottom Layer w0.203: U2.37 79.048,58.809 82.295,58.809 83.558,60.072 J2.1
NSWDIO: J2.3 U2.34 | length 14.8
  Top Layer w0.203: v1(77.479,63.198) 78.114,62.563 78.114,60.967 v1(78.038,60.891)
  Bottom Layer w0.203: v1(77.479,63.198) 77.856,62.822 U2.34 ; v1(78.038,60.891) 78.038,60.332 79.205,59.165 82.148,59.165 82.687,59.704 82.687,63.424 J2.3
OUT1: C10.1 C13.2 R10.2 U2.14 U5.1 | length 18.4
  Bottom Layer w0.254: U5.1@68.516,70.795 68.176,70.795 67.183,71.788 67.183,75.647 R10.2 68.35,76.814 70.866,76.814 C10.1 C13.2@73.049,75.976 ; U5.1 68.592,70.597 71.648,67.541 72.025,67.541 72.336,67.853 U2.14
OUT2: C12.1 R11.2 U2.13 U5.7 | length 8.4
  Bottom Layer w0.254: U2.13 71.836,70.534 73.278,71.976 U5.7@74.091,71.976 ; U5.7@74.002,72.065 U5.7@74.091,71.976 ; U5.7 U5.7@74.091,71.976 ; C12.1 R11.2 74.129,71.938 U5.7@74.091,71.976
P_3.3V: C8.2 C11.2 C17.2 J5.4 PM1.2 R2.2 R6.1 U4.3 U4.7 U4.8 U6.14 U6.15 | length 65
  Top Layer w0.508: v1(79.916,75.12) 79.906,75.11 v1(79.906,73.893) 79.906,72.69 v1(80.914,71.682) ; v1(90.036,72.841) v1(90.639,72.841) 94.624,72.841 96.91,70.555 101.703,70.555 v1(102.226,71.078) ; v1(100.978,67.362) 100.978,70.485
  Bottom Layer w0.203: U6.14 82.468,81.052 U6.15
  Bottom Layer w0.381: C8.2 C17.2 81.209,79.749 81.85,80.39 81.85,80.815 82.092,81.057 82.463,81.057 82.468,81.052
  Bottom Layer w0.508: R6.1 72.136,83.947 72.748,84.559 77.221,84.559 ; C8.2 79.012,80.555 77.221,80.555 ; v1(79.906,73.893) 79.906,74.476 R2.2 79.925,76.666 77.221,79.37 77.221,80.555 ; v1(80.521,72.067) 80.906,71.682 v1(80.914,71.682) 80.92,71.676 PM1.2 81.344,70.715 86.165,70.715 88.291,72.841 v1(90.036,72.841) v1(90.639,72.841) ; J5.4 80.644,86.335 78.997,86.335 77.221,84.559 ; U4.3 100.963,67.347 v1(100.978,67.362) ; C11.2 102.233,73.273 U4.7 ; v1(102.226,71.078) 102.233,71.085 U4.7 ; U4.8 U4.7 ; 77.221,80.555 77.221,84.559
P_C3.3V: BF1.2 C3.2 C4.2 C15.1 C18.2 D1.C J2.4 J4.2 PM1.3 PNP1.2 R1.2 R15.2 R18.2 U2.1 U2.24 U2.36 U2.48 U5.8 | length 92.6
  Top Layer w0.254: v1(69.735,67.975) 69.735,67.289 70.18,66.844 71.341,66.844 72.199,65.986 v1(72.199,62.438)
  Top Layer w0.508: v1(72.199,62.438) v1@72.288,62.527 ; v1@75.375,70.303 75.518,70.16 77.245,70.16 77.462,70.377 77.462,71.437 v1(78.634,72.609) 78.666,72.641 v1@78.994,72.641 ; v1@78.836,60.304 79.416,59.724 85.668,59.724 87.493,57.899 93.681,57.899 v1(97.103,61.321) ; v1@78.839,60.301 78.839,68.655 v1(78.898,68.714)
  Bottom Layer w0.254: C4.2 69.132,61.822 U2.1 ; BF1.2 69.697,67.938 v1(69.735,67.975) ; v1(72.199,62.438) v1@72.224,62.413 ; v1(77.327,69.978) v1@77.336,69.969 ; R1.2@77.419,77.089 77.633,77.303 78.796,76.14 78.796,72.894 79.08,72.609 79.08,72.199 PM1.3 ; D1.C@100.972,60.432 D1.C@101.023,60.382 ; R18.2@102.18,60.229 R18.2
  Bottom Layer w0.381: v1(77.327,69.978) 77.327,67.995 U2.24@77.368,67.954 ; U2.36 78.636,60.362 79.361,59.638 81.742,59.638 82.145,60.041 82.145,64.152 J2.4
  Bottom Layer w0.508: U2.1@70.536,61.79 71.602,61.79 71.805,61.993 ; C15.1 71.628,60.304 ; 71.805,62.006 71.805,61.993 ; PNP1.2@73.123,58.705 72.646,59.182 72.299,59.182 71.805,59.676 71.805,61.993 ; U5.8@74.002,70.795 v1(75.348,70.795) ; v1@75.375,70.303 75.375,70.768 v1(75.348,70.795) ; R15.2 v1(75.348,70.795) ; U2.24@77.368,67.954 77.368,67.556 72.224,62.413 71.805,61.993 ; 77.481,68.197 C3.2 78.921,68.691 v1(78.898,68.714) ; v1(78.634,72.609) 79.08,72.609 v1(79.208,72.609) ; v1(97.103,61.321) 97.581,61.799 C18.2 99.605,61.799 D1.C@100.972,60.432 ; D1.C@101.023,60.382 R18.2 102.227,60.428 102.227,62.32 J4.2
  other v1: 78.799,60.301 78.799,60.775 78.799,61.247 75.348,70.303
SW_WAKEUP: C28.2 S1.2 U6.22 | length 21
  Top Layer w0.203: v1(82.296,85.821) 82.296,88.985 86.148,92.837 v3(86.614,92.837) 91.694,92.837 92.377,92.154 S1.2@92.377,89.759
  Bottom Layer w0.203: v1(82.296,85.821) 82.321,85.821 83.543,84.599 U6.22 ; C28.2 85.737,92.837 v3(86.614,92.837)
SWCLK: J5.1 U6.26 | length 8.2
  Bottom Layer w0.203: J5.1 80.835,90.271 81.593,89.513 81.593,87.934 85.143,84.384 U6.26
SWDIO: J5.3 U6.25 | length 6.1
  Bottom Layer w0.203: J5.3 81.293,87.731 84.743,84.281 U6.25 84.743,84.265
V0.58: C16.1 P1.A R1.1 R9.2 U5.3 | length 16.8
  Top Layer w0.508: v1(69.582,73.69) 74.295,78.403 ; v3(74.791,77.851) 74.295,78.347 74.295,78.403 ; P1.A 78.422,82.529 74.295,78.403
  Bottom Layer w0.254: R9.2 v3(74.791,77.851) ; R9.2@74.918,77.216 R1.1
  Bottom Layer w0.508: U5.3 69.227,73.335 v1(69.582,73.69) ; v3(74.791,77.851) C16.1
VBAT: J1.1 PM2.3 U1.3 | length 20.9
  Bottom Layer w0.508: PM2.3 73.132,86.238 76.52,89.626 ; U1.3 76.52,89.626 ; J1.1 83.536,89.681 81.451,91.766 78.66,91.766 76.52,89.626
VDDA: BF1.1 C1.2 C2.2 U2.9 | length 7.1
  Top Layer w0.254: v1(68.312,66.438) 70.993,66.438 v1(71.564,65.867)
  Bottom Layer w0.254: C1.2 C2.2 67.564,66.438 v1(68.312,66.438) BF1.1 ; U2.9 71.518,65.822 v1(71.564,65.867)
pads on no net: J6.1 J7.1 J8.1 J9.1 J10.1 J11.1 J12.1 J13.1 J14. S1. U2.2 U2.3 U2.4 U2.5 U2.6 U2.10 U2.15 U2.16 U2.17 U2.18 U2.19 U2.20 U2.21 U2.25 U2.26 U2.27 U2.28 U2.29 U2.32 U2.33 U2.38 U2.39 U2.40 U2.41 U2.42 U2.43 U2.44 U2.45 U4.9 U6.6 U6.8 U6.13 U6.17 U6.18 U6.20 U6.24 U6.28 U6.32 U6.33 U6.36 U6.37 U6.39 U6.40 USB1. USB1.0 USB1.2 USB1.3 USB1.4

## Polygon pours and split planes (outlines as drawn)
GND on Top Layer "Top Layer-No Net" (solid, remove dead copper, pour order 4): 110.617,95.885 59.855,95.885 59.855,53.85 59.982,53.977 110.554,53.977
GND on Bottom Layer "Top Layer-No Net" (solid, remove dead copper, pour order 3): 110.871,94.361 60.109,94.361 60.109,52.326 60.236,52.453 110.808,52.453

## Keep-outs
Keep-Out Layer:
  lines w0.16: 66.758,57.522 ccw(c68.658,57.522) 68.658,55.622 102.658,55.622 ccw(c102.658,57.522) 104.558,57.522 104.558,91.522 ccw(c102.658,91.522) 102.658,93.422 68.658,93.422 ccw(c68.658,91.522) 66.758,91.522 66.758,57.522 ; 79.658,60.222 81.658,60.222 81.658,70.222 79.658,70.222 79.658,60.222

## Other copper
Top Layer:
  pour cut-out: 105.455,91.956 96.218,91.956 96.221,74.84 105.456,74.864
Bottom Layer:
  rectangle net GND: 95.03,74.916 96.16,80.666
  rectangle net GND: 96.147,75.436 98.19,76.456
  rectangle net GND: 97.43,76.434 98.19,79.426
  rectangle: 98.049,78.036 99.59,79.426
  rectangle: 98.821,75.426 99.591,78.05
  rectangle: 99.535,75.427 100.983,76.447
  rectangle: 100.213,76.142 100.983,78.766
  rectangle: 100.214,77.907 102.381,79.426
  rectangle: 101.62,75.426 102.38,77.918
  rectangle: 103.24,75.427 104.006,81.013
  rectangle: 101.75,75.426 103.917,76.449
  rectangle: 98.657,80.403 103.849,81.013
  rectangle net NetC21_2: 98.657,80.403 99.288,86.123
  rectangle: 99.73,80.403 100.381,82.291
  rectangle: 99.73,81.647 104.006,82.291
  rectangle: 103.238,81.649 104.004,83.557
  rectangle: 99.863,82.918 104.004,83.559
  rectangle: 99.862,82.918 100.517,84.833
  rectangle: 99.862,84.188 104,84.834
  region: 103.239,88.892 103.239,84.188 104,84.188 104,88.892
  rectangle net NetC21_2: 90.8,81.302 99.017,81.94
  rectangle: 99.87,88.261 104,88.892
  rectangle: 99.871,88.261 100.513,90.033
  region: 99.87,90.033 99.87,89.393 101.505,89.393 101.505,90.033
  rectangle: 98.657,85.428 102.635,86.123
  rectangle: 101.983,85.428 102.635,87.64
  rectangle: 98.678,86.999 102.635,87.64
  rectangle: 98.679,87.374 99.308,91.18
  region: 98.846,91.18 98.846,90.532 102.873,90.532 102.873,91.18
  rectangle net GND: 95.029,82.575 96.159,91.934
  region net NetC21_1: 88.185,81.991 88.185,81.351 89.82,81.351 89.82,81.991
  pour cut-out: 105.455,91.956 96.218,91.956 96.221,74.84 105.456,74.864

## Silkscreen, mask and mechanical layers (free items; w line width, h text height)
Top Overlay:
  circle w0.16: c90.958,65.122 r6.5
  circle w0.16: c73.658,79.522 r0.5
  circle w0.16: c78.658,79.522 r0.5
  circle w0.16: c76.158,82.522 r1.25
  lines w0.152: 82.558,57.622 ccw(c84.058,57.622) 84.058,56.122 99.058,56.122 ccw(c99.058,57.622) 100.558,57.622 100.558,72.622 ccw(c99.058,72.622) 99.058,74.122 84.058,74.122 ccw(c84.058,72.622) 82.558,72.622 82.558,57.622
  lines w0.16: 72.138,79.542 cw(c72.138,78.542) 73.138,78.542 ; 72.158,79.522 72.158,85.522 80.158,85.522 80.158,79.522 ccw(c80.158,78.522) 79.158,78.522 ; 74.158,56.522 78.158,56.522 ; 74.158,62.522 74.221,62.522 78.094,62.522 78.158,62.522 ; 82.712,93.422 81.658,93.422 81.658,55.622 82.714,55.622 ; 82.721,55.617 82.721,93.417 ; 79.158,78.522 ccw(c78.158,78.522) 78.158,79.522 74.158,79.522 ccw(c74.158,78.522) 73.158,78.522 73.158,56.022 74.158,56.022 74.158,73.522 78.158,73.522 78.158,56.022 79.158,56.022 79.158,78.522
Bottom Overlay:
  circle w0.16: c68.658,91.522 r1.8
  circle w0.16: c68.658,57.522 r1.8
  circle w0.16: c102.658,57.522 r1.8
  circle w0.16: c84.058,57.622 r1.8
  circle w0.16: c84.058,72.622 r1.8
  circle w0.16: c99.058,57.622 r1.8
Mechanical 3:
  lines w0.16: 95.004,74.855 95.004,91.955 96.204,91.955 96.204,74.855 95.004,74.855
Mechanical 4:
  lines w0.16: 95.004,74.855 95.004,91.955 104.404,91.955 104.404,74.855 95.004,74.855
Mechanical 5:
  lines w0.1: 95.404,79.855 cw(c95.404,80.055) 95.404,80.255 cw(c95.404,80.055) 95.404,79.855 ; 95.404,84.155 cw(c95.404,84.355) 95.404,84.555 cw(c95.404,84.355) 95.404,84.155 ; 95.404,86.955 cw(c95.404,87.155) 95.404,87.355 cw(c95.404,87.155) 95.404,86.955 ; 95.504,74.955 cw(c95.504,75.155) 95.504,75.355 cw(c95.504,75.155) 95.504,74.955 ; 95.504,77.855 cw(c95.504,78.055) 95.504,78.255 cw(c95.504,78.055) 95.504,77.855 ; 95.504,89.855 cw(c95.504,90.055) 95.504,90.255 cw(c95.504,90.055) 95.504,89.855 ; 95.604,88.255 cw(c95.604,88.455) 95.604,88.655 cw(c95.604,88.455) 95.604,88.255 ; 95.704,76.855 cw(c95.704,77.055) 95.704,77.255 cw(c95.704,77.055) 95.704,76.855 ; 95.704,78.955 cw(c95.704,79.155) 95.704,79.355 cw(c95.704,79.155) 95.704,78.955 ; 95.704,83.055 cw(c95.704,83.255) 95.704,83.455 cw(c95.704,83.255) 95.704,83.055 ; 95.704,85.555 cw(c95.704,85.755) 95.704,85.955 cw(c95.704,85.755) 95.704,85.555 ; 95.704,91.055 cw(c95.704,91.255) 95.704,91.455 cw(c95.704,91.255) 95.704,91.055

## Text inside footprints (layer, text, board x,y; h text height)
U4: Mechanical 15 "1" at 101.434,69.568 h0.75 r180